# Altium PCB daughterboard.PcbDoc
Units mm, origin at the board's own origin, x right, y up, seen from the top; angles counter-clockwise.
Board outline 30 x 30 mm, 4 copper layers (Top Layer, Layer 1, Layer 2, Bottom Layer), stack 0.603 mm thick; 59 components, 37 nets, 249 pads, 127 vias.
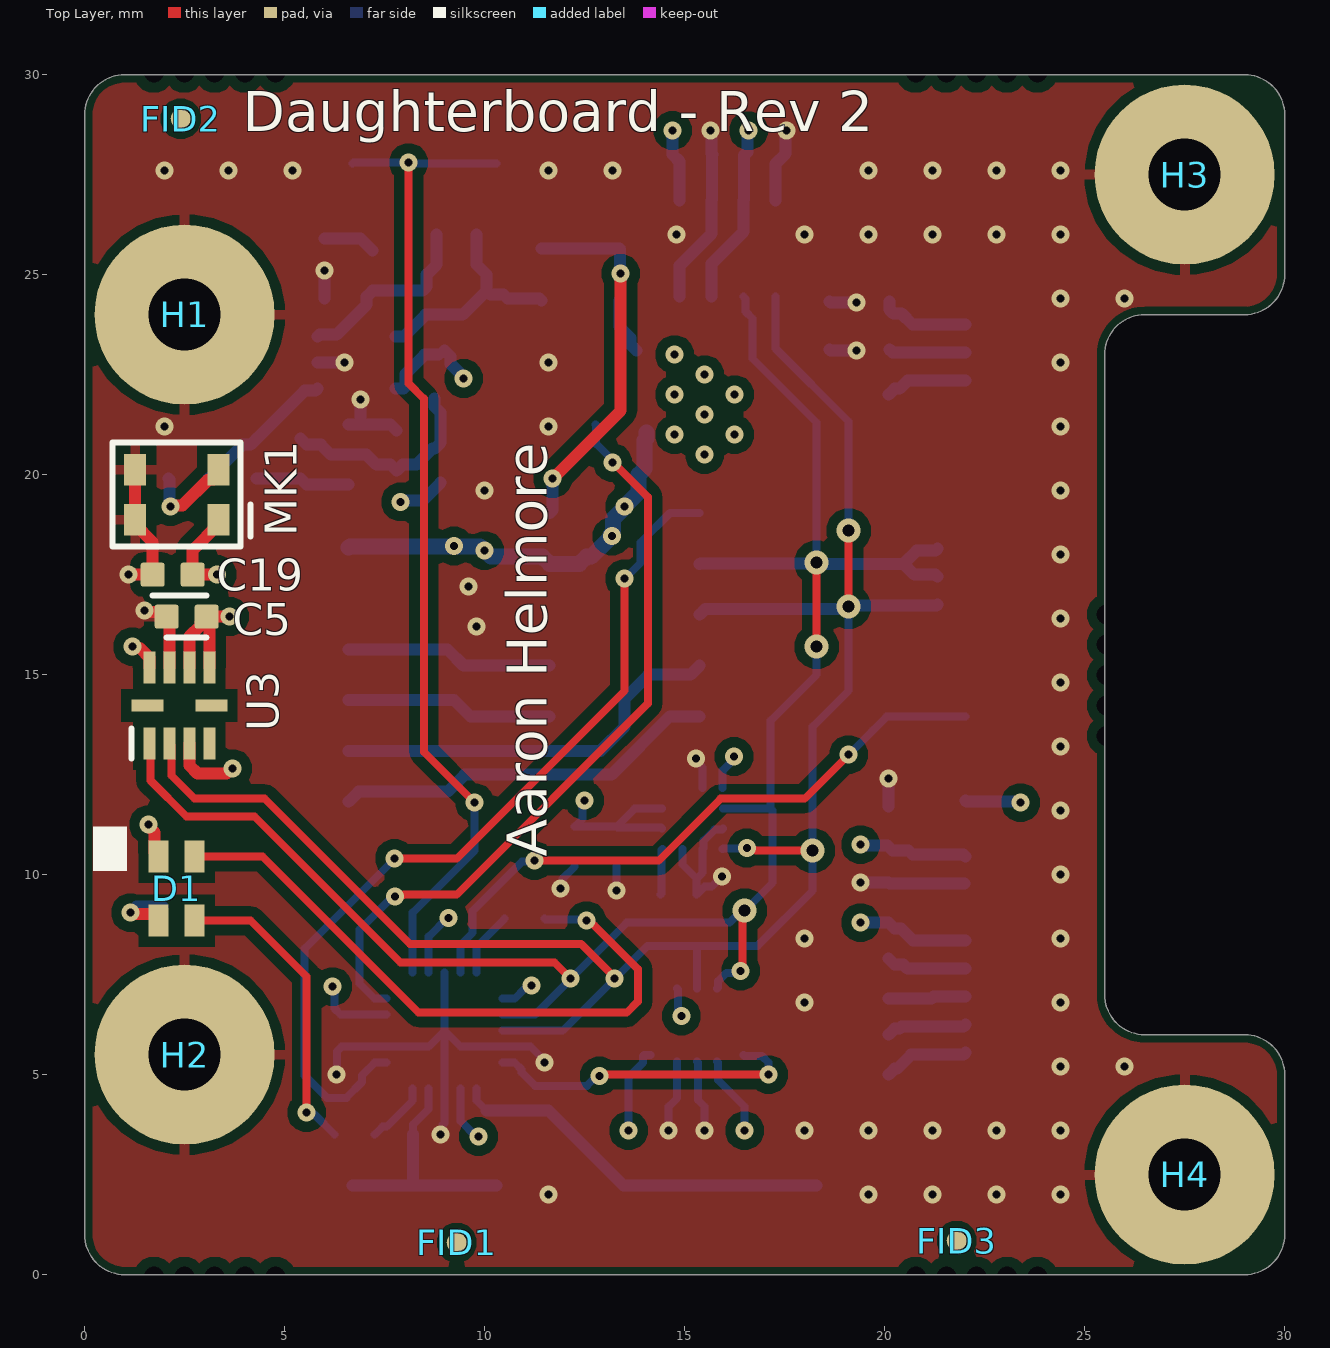
[diagram p0: Top Layer view]
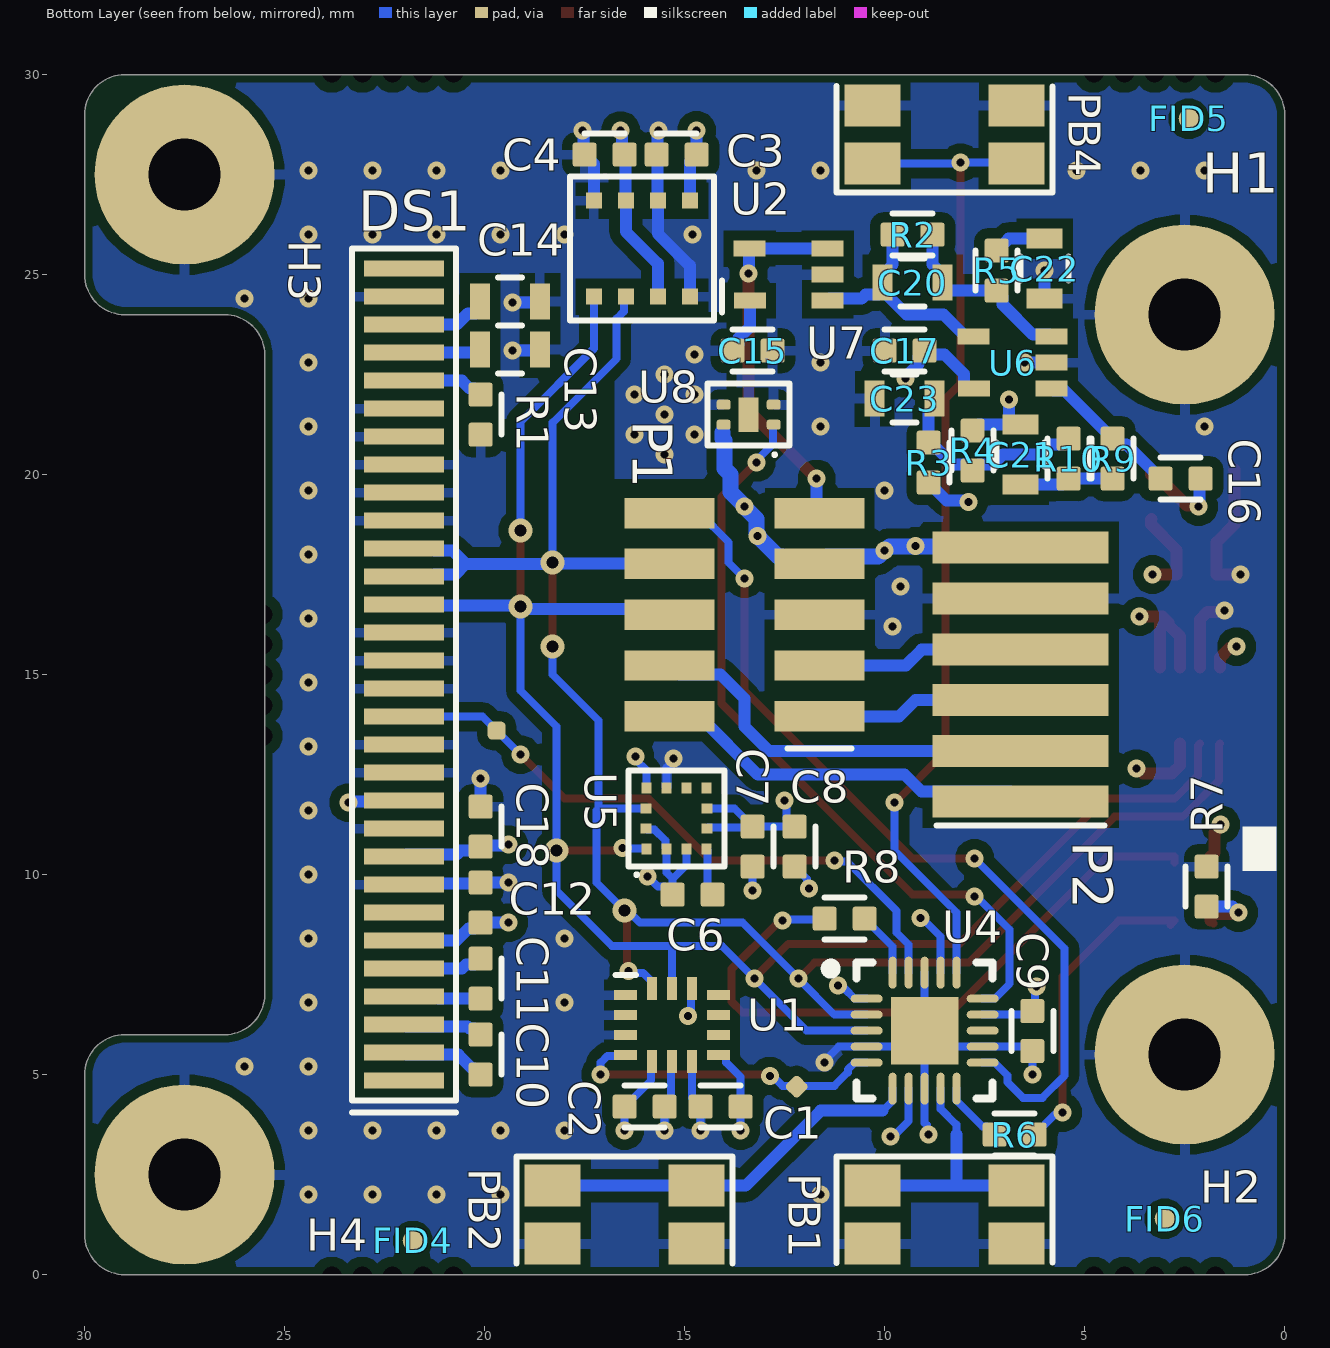
[diagram p1: Bottom Layer view, seen from below]
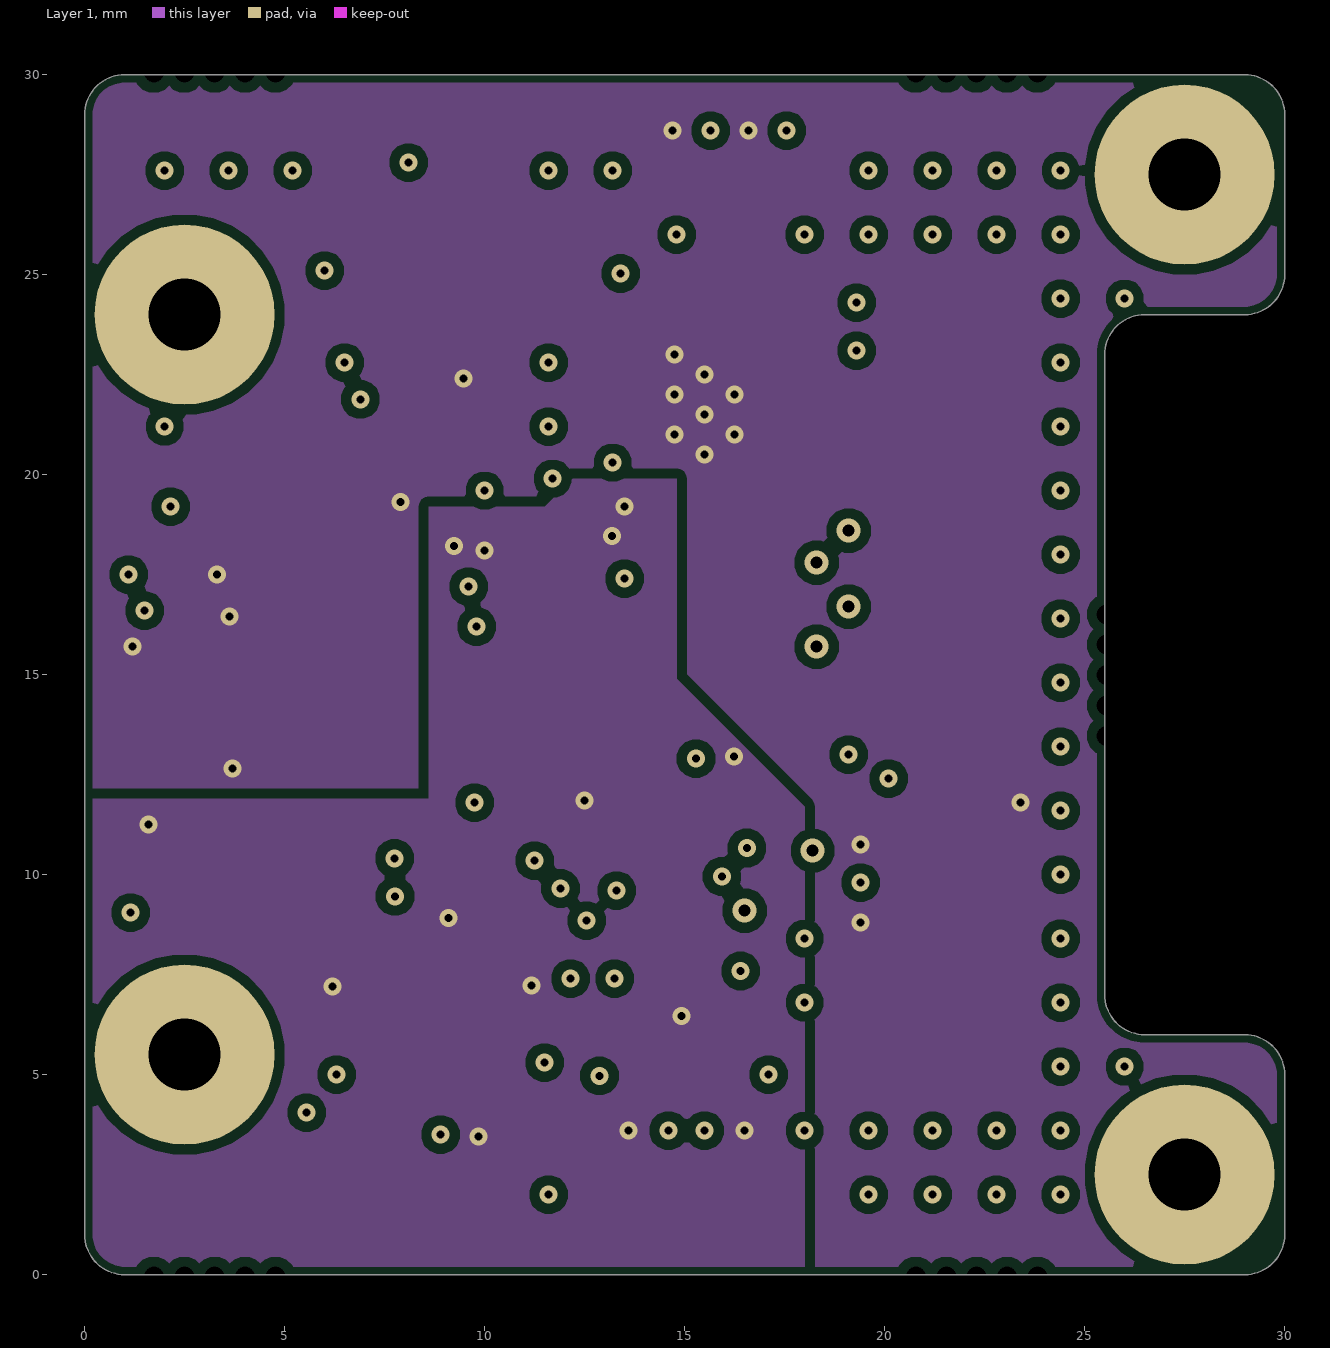
[diagram p2: Layer 1]
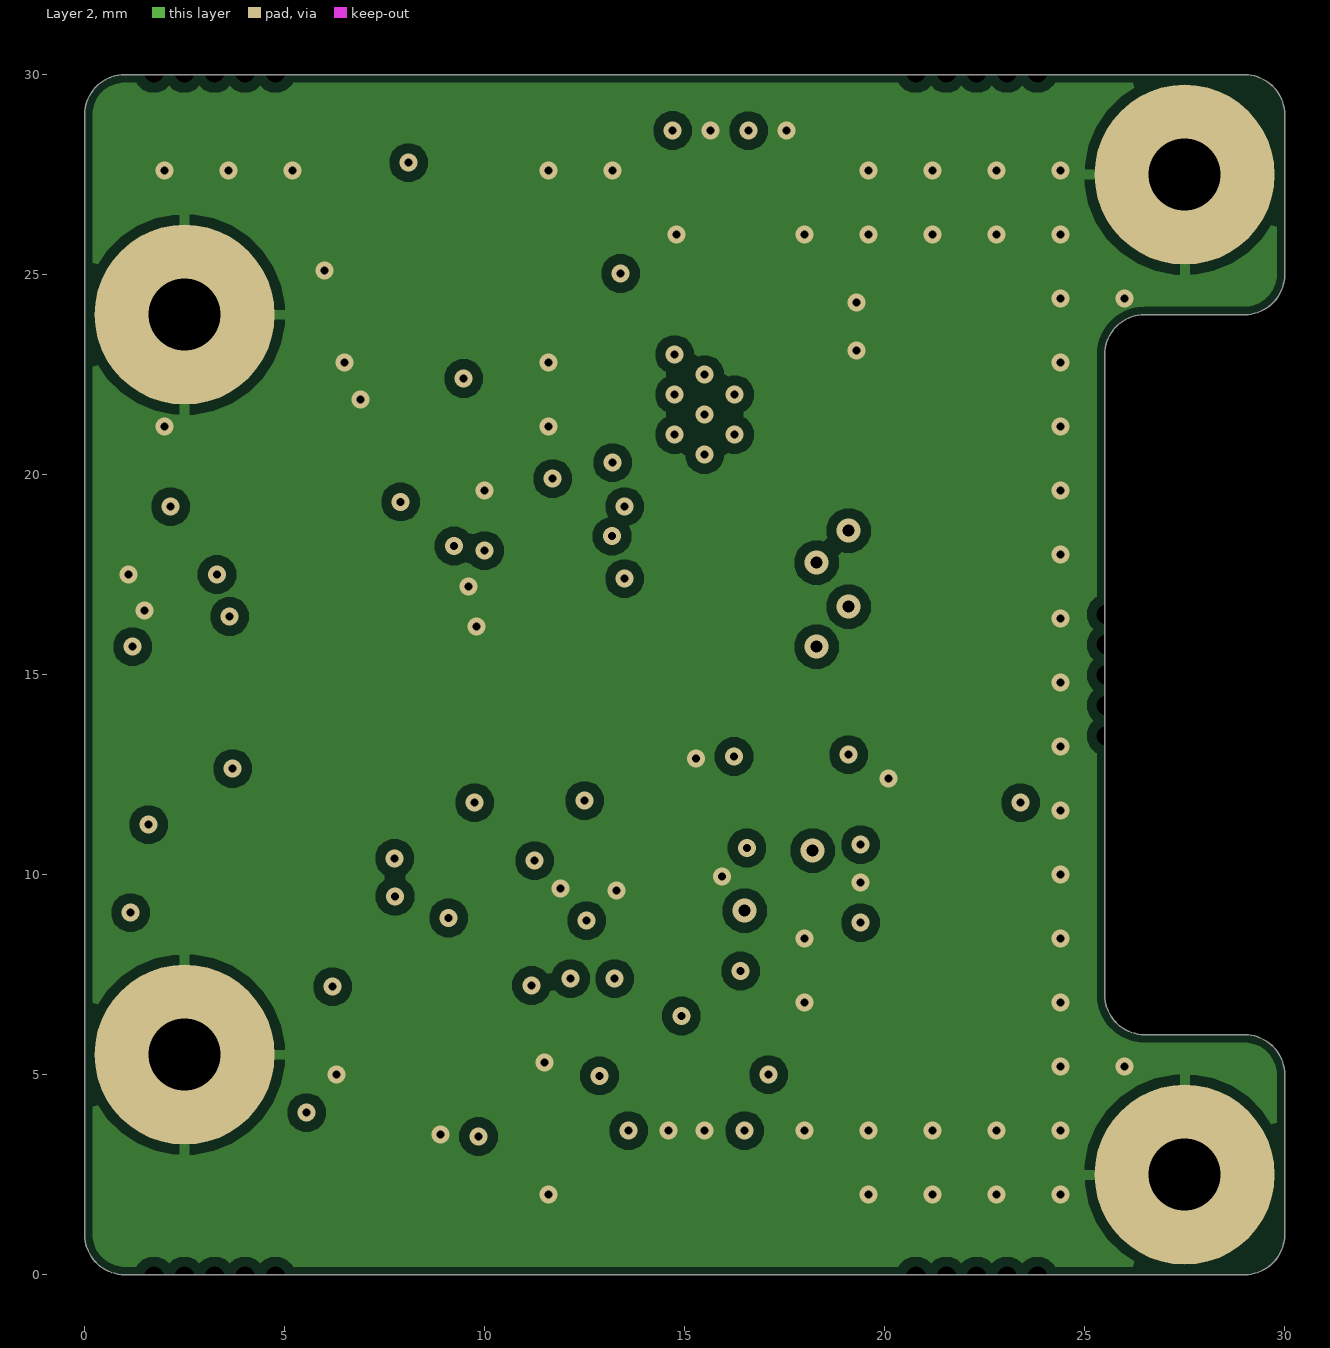
[diagram p3: Layer 2]

## Layer stack, top to bottom
Top Solder: solder mask 0.0102, Solder Resist, Dk 3.5
Top Layer: signal copper 0.0356
Dielectric 2: prepreg 0.0711, PP-006, Dk 4.1
Layer 1: signal copper 0.035
Dielectric 1: dielectric 0.32, FR-4, Dk 4.8
Layer 2: signal copper 0.035
Dielectric 3: prepreg 0.0711, PP-006, Dk 4.1
Bottom Layer: signal copper 0.0356
Bottom Solder: solder mask 0.0102, Solder Resist, Dk 3.5

## Board outline
1,0 cw(c1,1) 0,1 0,29 cw(c1,29) 1,30 0.998,30 29,30 cw(c29,29) 30,29 30,25 cw(c29,25) 29,24 26.5,24 ccw(c26.5,23) 25.5,23 25.5,7 ccw(c26.5,7) 26.5,6 29,6 cw(c29,5) 30,5 30,1 cw(c29,1) 29,0

## Design rules (kind name [scope] priority, off if disabled: settings)
BoardOutlineClearance Board_MouseBite_Clearance [IsFree and IsThruPin] p1: gap=0 ignorepadtopadclearanceinfootprint=FALSE
BoardOutlineClearance [All] p2: gap=0.2 ignorepadtopadclearanceinfootprint=FALSE
Clearance OLEDClearance [InComponent('OLED')] p1: gap=0 ignorepadtopadclearanceinfootprint=FALSE
Clearance ViaSameNet [IsVia vs IsVia] p2: gap=0.254 ignorepadtopadclearanceinfootprint=FALSE
Clearance [All] p3: gap=0.254 ignorepadtopadclearanceinfootprint=FALSE except(0: Arc-Hole Track-Hole SMDPad-Hole THPad-Hole Via-Hole Fill-Hole Poly-Hole Region-Hole Text-Hole; 0.1: Arc-Arc Arc-Track Track-Track; 0.127: SMDPad-SMDPad; 0.15: Arc-Text Track-Text SMDPad-Text THPad-Text Via-Text Fill-Text Poly-Text Region-Text Text-Text; 0.2: Arc-SMDPad Arc-THPad Track-SMDPad Track-THPad; 0.5: THPad-THPad THPad-Via Via-Via)
HoleSize [All] p1: absolutevalues=TRUE maxlimit=6.3 minlimit=0.2 maxpercent=80.000 minpercent=20.000
MinimumAnnularRing [All] p1: minimumring=0.1
MinimumSolderMaskSliver [All] p1: minsoldermaskwidth=0.1
PasteMaskExpansion [All] p1: expansion=0 percent=-10.000000
PolygonConnect [All] p1: thpad.connectstyle=Relief thpad.reliefconductorwidth=0.254 thpad.reliefentries=4 thpad.polygonreliefangle="90 Angle" thpad.airgapwidth=0.254 smdpad.connectstyle=Relief smdpad.reliefconductorwidth=0.254 smdpad.reliefentries=4 smdpad.polygonreliefangle="90 Angle" smdpad.airgapwidth=0.254 via.connectstyle=Direct via.reliefconductorwidth=0.254 via.reliefentries=4 via.polygonreliefangle="90 Angle" via.airgapwidth=0.254
RoutingVias [All] p1: holewidth=0.711 width=1.27 viastyle="Through Hole" minholewidth=0.2 minwidth=0.45 maxholewidth=0.711 maxwidth=1.27
SilkToSilkClearance [All] p1: silktosilkclearance=0.15
SilkToSolderMaskClearance [IsPad] p1: minsilkscreentomaskgap=0.1 clearancetoexposedcopper=TRUE
SolderMaskExpansion [All] p1: expansion=0.05 istentingtop=TRUE
Width [All] p1: maxlimit=0.5 minlimit=0.15 preferedwidth=0.254 minimp=50.000000 maximp=50.000000 favimp=50.000000
25 further rules are at their usual default settings.

## Components (designator, comment, footprint, x,y, rotation, side; value= is the part's Value field where it differs from the comment)
C1 "100nF" CAP_0402 14.6,4.2 r180 bottom
C2 "100nF" CAP_0402 15.5,4.2 r0 bottom
C3 "100nF" CAP_0402 15.7,28 r180 bottom
C4 "100nF" CAP_0402 17.5,28 r180 bottom
C5 "100nF" CAP_0402 2.05,16.45 r0 top
C6 "100nF" CAP_0402 15.3,9.5 r180 bottom
C7 "100nF" CAP_0402 13.3,10.2 r90 bottom
C8 "1uF" CAP_0402 12.25,10.2 r90 bottom
C9 "100nF" CAP_0402 6.31,5.59 r90 bottom
C10 "1uF" CAP_0402 20.1,5 r90 bottom
C11 "1uF" CAP_0402 20.1,7.9 r270 bottom
C12 "1uF" CAP_0402 20.1,9.8 r270 bottom
C13 "2.2uF" CAP_0603 19.37,23.13 r0 bottom
C14 "2.2uF" CAP_0603 19.37,24.33 r0 bottom
C15 "100nF" CAP_0402 12.8,23.1 r0 bottom
C16 "1uF" CAP_0402 3.1,19.9 r180 bottom
C17 "100nF" CAP_0402 10,23.1 r180 bottom
C18 "1uF" CAP_0402 20.1,11.7 r270 bottom
C19 "100nF" CAP_0402 1.7,17.5 r0 top
C20 "360pF" CAP_0603 9.3,24.8 r180 bottom
C21 "10uF" CAP_0603 6.6,20.5 r270 bottom
C22 "220nF" CAP_0603 6,25.15 r90 bottom
C23 "22uF" CAP_0603 9.5,21.9 r180 bottom
D1 "B38G3RGB" B38G3RGB 2.3,9.65 r0 top
DS1 "OLED_SSD1306" OLED_0.96INCH_SSD1306 22.02,15 r90 bottom
FID1 "Fiducial" FIDUCIAL_0.5MM_SOLDER_1MM_MASK 9.3,0.8 r90 top
FID2 "Fiducial" FIDUCIAL_0.5MM_SOLDER_1MM_MASK 2.4,28.9 r90 top
FID3 "Fiducial" FIDUCIAL_0.5MM_SOLDER_1MM_MASK 21.8,0.85 r90 top
FID4 "Fiducial" FIDUCIAL_0.5MM_SOLDER_1MM_MASK 21.8,0.85 r90 bottom
FID5 "Fiducial" FIDUCIAL_0.5MM_SOLDER_1MM_MASK 2.4,28.9 r90 bottom
FID6 "Fiducial" FIDUCIAL_0.5MM_SOLDER_1MM_MASK 3,1.4 r90 bottom
H1 "M1.6 Hole" M1.6#1 52.59,4.03 r0 top
H2 "M1.6 Hole" M1.6#2 46.32,4.03 r0 top
H3 "M1.6 Hole" M1.6#3 40.05,4.03 r0 top
H4 "M1.6 Hole" M1.6#4 33.78,4.03 r0 top
MK1 "CMM_3125" CMM_3125 2.3,19.5 r270 top
P1 "LPPB_10_2_NFSS" LPPB_10_2_NFSS 13.5,16.5 r270 bottom locked
P2 "CONN_1-26_6x1" 851-PP-NNN-40-001101 6.6,15 r90 bottom locked
PB1 "Pushbutton" EVQP7A 8.5,1.5 r180 bottom locked
PB2 "Pushbutton" EVQP7A 16.5,1.5 r180 bottom locked
PB4 "Pushbutton" EVQP7A 8.5,28.5 r0 bottom locked
R1 "390K" RES_0402 20.1,22 r270 bottom
R2 "42.2k" RES_0402 8.8,26 r0 bottom
R3 "1M" RES_0402 8.9,19.8 r90 bottom
R4 "1M" RES_0402 7.8,20.1 r90 bottom
R5 "10K" RES_0402 7.2,24.6 r90 bottom
R6 "10k" RES_0402 6.25,3.5 r0 bottom
R7 "10k" RES_0402 1.95,9.2 r90 bottom
R8 "10k" RES_0402 11.5,8.9 r180 bottom
R9 "10K" RES_0402 4.3,20.9 r270 bottom
R10 "10K" RES_0402 5.4,19.9 r90 bottom
U1 "LSM6DSO32TR" LSM6DSO 16.475,6.99 r180 bottom
U2 "BME680" BME680 16.07,25.65 r270 bottom
U3 "Si1132" Si1132 2.365,14.23 r90 top
U4 "SX1508B" QFN40P300X300X60_HS-21N 9,6.1 r180 bottom
U5 "LIS3MDL" LIS3MDL 15.2,11.4 r90 bottom
U6 "AZV321" SC-70-5 6.8,22.8 r270 bottom
U7 "AZV321" SC-70-5 12.4,25 r270 bottom
U8 "MIC94300YMT" MIC94300YMT 13.4,21.5 r270 bottom

## Footprints (in the part's own frame and the unit in brackets; to place one, negate y for a bottom-side part, rotate by r counter-clockwise, add the part's x,y. Pads: shape width x height; smd on the part's side, far side on the other; paste and mask are expansions set on the pad)
851-PP-NNN-40-001101 [mm]
  rect 0.8x4.4 smd mask+0.05: 1(-3.175,0) 2(-1.905,0) 3(-0.635,0) 4(0.635,0) 5(1.905,0) 6(3.175,0)
  silkscreen extent -3.77,-2.1 -3.77,2.1, body extent -4,-6.6 4,2.5, height 2.2
B38G3RGB [mm] "RGB LED"
  rect 0.5x0.8 smd paste-0.016 mask+0.05: 1(0.45,-0.8) 2(-0.45,-0.8) 3(-0.45,0.8) 4(0.45,0.8)
  body extent -0.8,-0.8 0.8,0.8, height 0.4
BME680 [mm]
  rect 0.4x0.4 smd paste-0.021 mask+0.1: 1(1.2,1.2) 2(1.2,0.4) 3(1.2,-0.4) 4(1.2,-1.2) 5(-1.2,-1.2) 6(-1.2,-0.4) 7(-1.2,0.4) 8(-1.2,1.2)
  silkscreen extent -1.8,-1.8 1.8,2, body extent -1.5,-1.5 1.5,1.5, height 1
CAP_0402 [mm]
  rrect20% 0.6x0.6 smd mask+0.05: 1(0,0) 2(1,0)
  silkscreen extent 0,-0.53 1,0.53, body extent 0,-0.25 1,0.25, height 0.6
CAP_0603 [mm]
  rect 0.5x0.9 smd mask+0: 1(-0.75,0) 2(0.75,0)
  silkscreen extent -0.3,-0.6 0.3,0.6, body extent -0.8,-0.4 0.8,0.4, height 0.9
CMM_3125 [mm] "MEMS Microphone"
  rect 0.79x0.55 smd mask+0.05: 1(0.625,1.04) 2(0.625,-1.04) 3(-0.625,-1.04) 4(-0.625,1.04)
  silkscreen extent -1.3,-1.6 1.3,1.85, body extent -1.25,-1.55 1.25,1.55, height 1.1
EVQP7A [mm] "Right angle tactile switch"
  rect 1.4x1.05 smd mask+0.05: 1(-1.8,0.725) 1(1.8,0.725) 2(-1.8,-0.725) 2(1.8,-0.725)
  silkscreen extent -2.7,-1.21 2.7,1.45, body extent -2.35,-2.1 2.35,1.45, height 1.35
FIDUCIAL_0.5MM_SOLDER_1MM_MASK [mm]
  round 0.5 smd mask+0.25: 1(0,0)
LIS3MDL [mm] "ST LGA-12 2x2 Magnetometer"
  rect 0.275x0.25 smd paste-0.021 mask+0.05: 1(-0.763,0.75) 2(-0.763,0.25) 3(-0.763,-0.25) 4(-0.763,-0.75) 7(0.763,-0.75) 8(0.763,-0.25) 9(0.763,0.25) 10(0.763,0.75)
  rect 0.25x0.275 smd paste-0.021 mask+0.05: 5(-0.25,-0.763) 6(0.25,-0.763) 11(0.25,0.763) 12(-0.25,0.763)
  silkscreen extent -1.41,-1.2 1.2,1.2, body extent -1,-1 1,1, height 1
LPPB_10_2_NFSS [mm]
  rect 0.76x2.25 smd mask+0.05: 1(2.54,1.875) 2(2.54,-1.875) 3(1.27,1.875) 4(1.27,-1.875) 5(0,1.875) 6(0,-1.875) 7(-1.27,1.875) 8(-1.27,-1.875) 9(-2.54,1.875) 10(-2.54,-1.875)
  silkscreen extent 3.34,1.07 3.34,2.68, body extent -3.1,-2.64 3.1,2.64, height 4.65
LSM6DSO [mm]
  rect 0.575x0.25 smd paste-0.028 mask+0.05: 1(0,0) 2(0,-0.5) 3(0,-1) 4(0,-1.5) 8(2.325,-1.5) 9(2.325,-1) 10(2.325,-0.5) 11(2.325,0)
  rect 0.25x0.575 smd paste-0.028 mask+0.05: 5(0.663,-1.663) 6(1.162,-1.663) 7(1.662,-1.663) 12(1.662,0.163) 13(1.162,0.163) 14(0.663,0.163)
  silkscreen extent -0.26,0.5 0.26,0.5, body extent -0.34,-2 2.66,0.5, height 0.86
M1.6#1 [mm]
  round 4.5 hole 1.8 mask+0.25: 1(-50.09,19.97)
M1.6#2 [mm]
  round 4.5 hole 1.8 mask+0.25: 1(-43.82,1.47)
M1.6#3 [mm]
  round 4.5 hole 1.8 mask+0.25: 1(-12.55,23.47)
M1.6#4 [mm]
  round 4.5 hole 1.8 mask+0.25: 1(-6.28,-1.53)
MIC94300YMT [mm] "200mA load switch"
  rrect50% 0.25x0.35 smd paste-0.008 mask+0.05: 1(0.25,0.625) 2(-0.25,0.625) 3(-0.25,-0.625) 4(0.25,-0.625)
  rect 0.86x0.5 smd paste-0.033 mask+0.05: EP1(0,0)
  silkscreen extent -0.77,-1.03 1.01,1.03, body extent -0.6,-0.8 0.6,0.8, height 0.55
OLED_0.96INCH_SSD1306 [mm]
  rect 0.4x2 smd mask+0.05: 1(-10.15,0) 2(-9.45,0) 3(-8.75,0) 4(-8.05,0) 5(-7.35,0) 6(-6.65,0) 7(-5.95,0) 8(-5.25,0) 9(-4.55,0) 10(-3.85,0) 11(-3.15,0) 12(-2.45,0) 13(-1.75,0) 14(-1.05,0) 15(-0.35,0) 16(0.35,0) 17(1.05,0) 18(1.75,0) 19(2.45,0) 20(3.15,0) 21(3.85,0) 22(4.55,0) 23(5.25,0) 24(5.95,0) 25(6.65,0) 26(7.35,0) 27(8.05,0) 28(8.75,0) 29(9.45,0) 30(10.15,0)
  silkscreen extent -10.95,-1.3 10.65,1.3
QFN40P300X300X60_HS-21N [mm] "QFN, 20-Leads, Body 3.00x3.00mm, Pitch 0.40mm, Thermal Pad 1.68x1.68mm, IPC Medium Density"
  oval 0.8x0.2 smd paste-0.017 mask+0.05: 1(-1.45,0.8) 2(-1.45,0.4) 3(-1.45,0) 4(-1.45,-0.4) 5(-1.45,-0.8) 11(1.45,-0.8) 12(1.45,-0.4) 13(1.45,0) 14(1.45,0.4) 15(1.45,0.8)
  oval 0.2x0.8 smd paste-0.017 mask+0.05: 6(-0.8,-1.45) 7(-0.4,-1.45) 8(0,-1.45) 9(0.4,-1.45) 10(0.8,-1.45) 16(0.8,1.45) 17(0.4,1.45) 18(0,1.45) 19(-0.4,1.45) 20(-0.8,1.45)
  rect 1.68x1.68 smd paste-2539.97 mask+0.05: 21(0,0)
  silkscreen extent -2.48,-1.7 1.7,1.7, body extent -1.55,-1.55 1.55,1.55, height 0.6
RES_0402 [mm]
  rrect20% 0.6x0.6 smd mask+0.05: 1(0,0) 2(1,0)
  silkscreen extent 0,0.53 1,0.53, body extent 0,-0.25 1,0.25, height 0.35
SC-70-5 [mm]
  rect 0.4x0.8 smd mask+0: 1(0.65,0.975) 2(0,0.975) 3(-0.65,0.975) 4(-0.65,-0.975) 5(0.65,-0.965)
  body extent -1.05,-1.1 1.05,1.1, height 1
Si1132 [mm]
  rect 0.8x0.3 smd paste-0.023 mask+0.05: 1(-0.95,0.75) 2(-0.95,0.25) 3(-0.95,-0.25) 4(-0.95,-0.75) 6(0.95,-0.75) 7(0.95,-0.25) 8(0.95,0.25) 9(0.95,0.75)
  rect 0.3x0.8 smd paste-0.023 mask+0.05: 5(0,-0.8) 10(0,0.8)
  silkscreen extent -1.32,1.19 -0.57,1.19, body extent -1,-1 1,1, height 0.65

## Part data
C1 C2 C3 C4 C5 C6 C7 C8 C9 C10 C11 C12 C13 C14 C15 C16 C17 C18 C19 C20 C22 C23: library part Capacitor, Dielectric=X5R, Voltage=25V
C21: library part Capacitor, Dielectric=X5R, Voltage=10V
D1: "RGB LED"
DS1: "SSD1306 based OLED display"
H1 H2 H3 H4: library part "M1.6 Mounting Hole"
R1 R2 R3 R4 R5 R6 R7 R8 R9 R10: library part R_Small, Tolerance=1%
  R1 R2 R5 R6 R7 R8 R9 R10: Wattage=1/10W
  R3 R4: Wattage=1/16W
U1: "STM IMU"
U2: "Bosch gas, pressure and humidity sensor"
U3: "UV index and ambient light sensor"
U4: "8 channel GPIO expander with level shifting, LED driver and keypad engine"
U5: "ST magnetometer"
U8: "200mA load switch"

## Free pads (board coordinates)
  rrect50% 0.45x0.45 smd far side rot 45 paste-2539.97 mask+0.05: 2(12.2,4.7)
  rrect50% 0.45x0.45 smd far side paste-2539.97 mask+0.05: 2(19.7,13.6)
  round 0.2 hole 0.5 unplated paste+0 mask+0: MB(1.73,-0.05) MB(1.73,30.05) MB(2.49,-0.05) MB(2.49,30.05) MB(3.25,-0.05) MB(3.25,30.05) MB(4.01,-0.05) MB(4.01,30.05) MB(4.77,-0.05) MB(4.77,30.05) MB(20.78,-0.05) MB(20.78,30.05) MB(21.54,-0.05) MB(21.54,30.05) MB(22.3,-0.05) MB(22.3,30.05) MB(23.06,-0.05) MB(23.06,30.05) MB(23.82,-0.05) MB(23.82,30.05) MB(25.55,13.47) MB(25.55,14.23) MB(25.55,14.99) MB(25.55,15.75) MB(25.55,16.51)

## Via types
v1: diameter 0.45, hole 0.2, Top Layer to Bottom Layer, tented both sides, 120 vias
v2: diameter 0.6, hole 0.3, Top Layer to Bottom Layer, tented both sides, 6 vias
v3: diameter 0.45, hole 0.2, Top Layer to Bottom Layer, tented top, 1 vias

## Nets (pads, with @x,y where several pads share a name; then routed paths per layer and width w, separated by ;. In a path a pad name is that pad's centre, name@x,y a point inside that pad or via, vN(x,y) a via of type N, cw(c..) or ccw(c..) an arc to the next point about the centre after c; other vN are vias at no path point)
3V3: C1.2 C2.2 C7.2 C8.2 C9.2 D1.3 P1.7 P2.6 U1.5 U1.8 U1.12 U4.1 U4.7 U4.14 U4.17 U5.5 U5.6 U5.10 U8.4 | length 26.8
  Top Layer w0.3: v1(1.6,11.25) 1.6,11.209 1.75,11.059 1.75,10.55 D1.3
  Bottom Layer w0.2: v1(6.2,7.2) 6.248,7.152 6.248,6.652 6.4,6.5 U4.14 ; U4.17 8.6,8.45 9.071,8.921 v1(9.1,8.921) ; U4.7 9.4,3.842 9.786,3.456 v1(9.849,3.456) ; U4.1 10.75,6.9 11.002,7.152 11.025,7.152 11.103,7.23 v1(11.17,7.23) ; v1(12.5,11.85) 12.5,11.782 12.45,11.732 12.45,11.4 C8.2 C7.2 ; v1(13.6,3.6) C1.2 13.6,4.94 13.962,5.302 13.962,5.465 13.987,5.49 U1.8 ; U5.5 14.412,11.175 13.325,11.175 C7.2 ; U5.6 13.75,11.65 C7.2 ; U1.12 14.837,7.128 14.837,6.617 14.916,6.538 v1(14.916,6.47) ; U1.5 15.837,5.302 15.837,4.863 C2.2 v1(16.5,3.6) ; U5.10 15.95,12.603 16.234,12.887 v1(16.234,12.955)
  Bottom Layer w0.4: P2.6 6.628,18.203 9.225,18.203 v1(9.235,18.213) ; v1@9.258,18.203 9.883,18.203 9.986,18.1 10.014,18.1 10.164,17.95 11.445,17.95 P1.7 12.37,17.77 12.55,17.95 12.661,17.95 13.172,18.461 v1(13.186,18.461) ; v1@13.15,18.494 13.202,18.546 13.202,18.889 13.5,19.186 13.5,19.214 13.85,19.564 13.85,20 14,20.15 14,20.854 14.05,20.904 14.05,21.05
  other v1: 10,18.1 13.5,19.2
3V3_SW: C3.2 C4.2 C5.2 C12.2 C15.2 C17.2 C18.2 C19.2 DS1.6 DS1.9 DS1.11 MK1.1 R3.1 U2.2 U2.6 U2.8 U3.3 U3.6 U3.7 U3.9 U6.5 U7.5 U8.3 | length 26.6
  Top Layer w0.3: v1(1.2,15.699) 1.228,15.67 1.375,15.67 1.615,15.43 U3.9 ; U3.3 2.615,12.735 2.82,12.53 3.539,12.53 3.659,12.65 v1(3.7,12.65) ; U3.7 2.615,15.955 2.9,16.24 2.9,16.3 C5.2 ; U3.6 3.115,16.385 C5.2 ; v1(3.308,17.504) 3.306,17.502 2.702,17.502 C19.2 2.7,18.115 3.34,18.755 MK1.1 MK1.1@3.328,18.887 ; v1(3.626,16.453) 3.624,16.452 3.052,16.452 C5.2
  Bottom Layer w0.3: U6.5 7.965,22.15 8.015,22.2 8.015,22.515 8.499,22.999 C17.2@8.85,22.999 ; v1(7.9,19.321) 7.929,19.35 8.45,19.35 R3.1 ; C17.2 9.15,22.95 9.15,22.769 9.476,22.442 v1(9.476,22.402) ; U7.5 13.365,23.7 13.65,23.415 13.65,23.25 C15.2 ; v1(14.7,28.604) C3.2 14.87,27.83 U2.8 ; U2.2 15.67,25.275 16.47,26.075 U2.6 16.485,26.865 16.485,27.985 C4.2 16.571,28.071 16.571,28.571 v1(16.6,28.6) ; v1(19.4,8.8) C12.2 20.25,8.65 20.41,8.65 20.71,8.35 DS1.6 ; v1(19.4,10.75) 19.425,10.725 20.075,10.725 C18.2 20.201,10.599 20.601,10.599 20.7,10.5 21.97,10.5 DS1.9 ; DS1.11 22.045,11.825 23.375,11.825 v1(23.4,11.8)
  other v1: 15.5,20.5 14.75,21 16.25,21 15.5,21.5 14.75,22 16.25,22 15.5,22.5 14.75,23
3V3_SW_EN: U4.15 U8.1 | length 19.2
  Top Layer w0.2: v1(7.759,9.459) 7.798,9.498 7.975,9.498 7.977,9.5 9.3,9.5 14.079,14.279 14.079,19.44 13.219,20.3 v3(13.2,20.3)
  Bottom Layer w0.2: U4.15 7.25,6.9 6.875,7.275 6.875,8.625 7.709,9.459 v1(7.759,9.459) ; U8.1 12.788,21.238 12.788,20.771 13.2,20.359 v3(13.2,20.3)
DEBUG_UART_RX: P1.4 P2.2 | length 10.1
  Bottom Layer w0.3: P2.2 12.895,13.095 13.5,13.7 13.5,14.4 14.1,15 15.145,15 P1.4
DEBUG_UART_TX: P1.2 P2.1 | length 9.7
  Bottom Layer w0.3: P2.1 6.85,12.075 9.075,12.075 9.5,12.5 13.17,12.5 14.63,13.96 P1.2
GND: C1.1 C2.1 C3.1 C4.1 C5.1 C6.1 C7.1 C8.1 C9.1 C12.1 C13.1 C14.1 C15.1 C17.1 C18.1 C19.1 C21.1 C22.1 C23.1 DS1.8 DS1.10 DS1.12 DS1.13 DS1.15 DS1.16 DS1.17 DS1.21 DS1.22 DS1.23 DS1.24 DS1.25 DS1.29 H1.1 H2.1 H3.1 H4.1 MK1.2 MK1.3 P1.5 P2.5 PB1.2 PB2.2 PB4.2 R1.2 R4.2 R7.2 U1.1 U1.2 U1.3 U1.6 U1.7 U2.1 U2.5 U2.7 U3.8 U4.4 U4.8 U4.12 U4.18 U4.21 U5.2 U5.3 U5.9 U5.12 U6.2 U7.2 U8.2 U8.EP1 | length 39.6
  Top Layer w0.3: v1(1.1,17.5) C19.1 1.7,17.65 1.7,18.315 1.26,18.755 MK1.2 MK1.3 MK1.3@1.272,20.112 ; v1(1.5,16.6) 1.529,16.571 1.929,16.571 2.115,16.385 U3.8
  Bottom Layer w0.2: v1(6.3,5) 6.305,5.005 6.305,5.585 6.42,5.7 U4.12 8.6,5.7 U4.21 ; v1(8.9,3.5) 8.948,3.548 8.948,3.737 9,3.789 U4.8 U4.21 ; U4.18 U4.21 ; v1(11.5,5.3) 11.5,5.35 11.15,5.7 U4.4 9.4,5.7 U4.21 ; v1(11.898,9.655) 11.946,9.703 11.946,9.896 C8.1 ; v1(13.3,9.6) C7.1 ; v1(14.6,3.6) C1.1 14.812,4.412 U1.7 ; U5.3 14.95,10.25 15.3,9.9 ; v1(15.285,12.899) 15.285,12.847 15.45,12.682 U5.9 ; U1.6 15.337,5.302 15.337,4.363 C2.1 v1(15.5,3.6) ; v1(15.929,9.951) 15.918,9.951 15.667,9.7 15.5,9.7 C6.1 15.3,9.9 ; U5.12 15.938,11.125 15.751,11.125 15.475,10.849 15.475,10.662 U5.2 15.45,10.05 15.3,9.9 ; C12.1 C12.1@20.125,9.775 ; DS1.8@21.995,9.775 DS1.8
  Bottom Layer w0.3: U6.2 v1(6.5,22.8) ; C22.1 v1(6,25.1) ; C21.1 6.79,21.25 6.89,21.35 v1(6.89,21.885) ; C21.1@6.8,21.25 7.65,21.25 R4.2 ; U2.1 14.87,25.225 15.67,26.025 U2.7 15.685,26.865 15.685,27.985 C3.1 15.675,28.025 15.675,28.575 v1(15.65,28.6) ; U2.5 17.27,27.77 C4.1 17.525,28.025 17.525,28.575 v1(17.55,28.6) ; C13.1 18.65,23.1 v1(19.3,23.1) ; C14.1 18.65,24.3 v1(19.3,24.3) ; v1(19.4,9.8) C12.1 ; C18.1 v1(20.1,12.4) ; C12.1@20.125,9.775 DS1.8@21.995,9.775
  other v1: 11.6,2 19.6,2 21.2,2 22.8,2 24.4,2 18,3.6 19.6,3.6 21.2,3.6 22.8,3.6 24.4,3.6 24.4,5.2 26,5.2 18,6.8 24.4,6.8 18,8.4 24.4,8.4 24.4,10 24.4,11.6 24.4,13.2 24.4,14.8 9.8,16.2 24.4,16.4 9.6,17.2 24.4,18 10,19.6 24.4,19.6 2,21.2 11.6,21.2 24.4,21.2 11.6,22.8 24.4,22.8 24.4,24.4 26,24.4 14.8,26 18,26 19.6,26 21.2,26 22.8,26 24.4,26 2,27.6 3.6,27.6 5.2,27.6 11.6,27.6 13.2,27.6 19.6,27.6 21.2,27.6 22.8,27.6 24.4,27.6
HAT_INT: P1.10 U4.11 | length 22.3
  Top Layer w0.2: v1(7.75,10.409) 7.759,10.4 9.3,10.4 13.5,14.6 v1(13.5,17.4)
  Bottom Layer w0.2: U4.11 7.25,5.3 6.934,4.984 6.934,4.816 6.54,4.421 6.06,4.421 5.5,4.981 5.5,8.15 7.75,10.4 v1(7.75,10.409) ; v1(13.5,17.4) 13.9,17.8 13.9,18.31 14.63,19.04 P1.10
I2C_SCL: DS1.18 P1.6 U1.13 U2.4 U3.2 U4.3 U5.1 | length 48.6
  Top Layer w0.2: U3.2 2.165,13.23 2.165,12.485 2.75,11.9 4.5,11.9 8.129,8.271 12.41,8.271 13.25,7.431 v1(13.25,7.4) ; v1(16.552,10.668) 16.6,10.62 16.757,10.62 16.777,10.6 v2(18.2,10.6) ; v2(19.1,16.7) v2(19.1,18.6)
  Bottom Layer w0.2: U4.3 11.95,6.1 v1(13.25,7.4) 14.073,8.223 15.312,8.223 ; U1.13 15.312,8.223 ; U5.1 15.965,10.652 16.537,10.652 v1(16.552,10.668) ; U2.4 17.27,23.154 19.1,21.324 v2(19.1,18.6) ; v2(19.1,16.7) 19.1,14.6 18.2,13.7 v2(18.2,10.6) 18.2,9.6 16.823,8.223 15.312,8.223
  Bottom Layer w0.3: P1.6 15.518,16.643 19.043,16.643 v2(19.1,16.7) 19.125,16.725 21.295,16.725 DS1.18@21.32,16.75
I2C_SDA: DS1.19 DS1.20 P1.8 U1.14 U2.3 U3.1 U4.2 U5.11 | length 48.2
  Top Layer w0.2: U3.1 1.646,13.249 1.646,12.354 2.55,11.45 4.25,11.45 7.9,7.8 10.922,7.8 10.93,7.809 11.41,7.809 11.419,7.8 11.75,7.8 v1(12.15,7.4) ; v1(16.4,7.594) 16.448,7.642 16.448,9.048 v2(16.5,9.1) ; v2(18.3,15.7) v2(18.3,17.8)
  Bottom Layer w0.2: U4.2 11.259,6.5 v1@12.15,7.391 ; v1(12.15,7.4) 13.55,8.8 16.119,8.8 v2@16.419,9.1 ; U1.14 15.837,7.178 15.837,7.34 16.043,7.546 16.352,7.546 v1(16.4,7.594) ; U5.11 17.15,11.65 ; U2.3 16.522,24.398 16.522,24.078 16.7,23.9 16.7,22.9 18.3,21.3 v2(18.3,17.8) ; v2(16.5,9.1) 17.2,9.8 17.2,11.6 17.15,11.65 ; v2(18.3,15.7) 18.3,15 17.15,13.85 17.15,11.65
  Bottom Layer w0.3: v1@12.15,7.391 v1(12.15,7.4) ; P1.8 15.39,17.785 18.285,17.785 v2(18.3,17.8) 18.33,17.77 20.47,17.77 ; v2@16.419,9.1 v2(16.5,9.1) ; DS1.19@21.32,17.45 21.27,17.5 20.74,17.5 20.47,17.77 ; DS1.20@21.32,18.15 21.27,18.1 20.8,18.1 20.47,17.77
LSM6D_INT: pad.2@12.2,4.7 U1.4 U4.5 | length 8
  Top Layer w0.2: v1(12.872,4.972) 12.899,5 v1(17.1,5)
  Bottom Layer w0.2: U4.5 10.75,5.3 10.921,5.129 10.921,5.06 11.26,4.721 12.553,4.721 12.804,4.972 v1(12.872,4.972) ; U1.4 16.5,5.465 16.935,5.465 17.1,5.3 v1(17.1,5)
MIC: P1.9 U7.3 U7.4 | length 9.3
  Top Layer w0.3: v1(11.7,19.9) 13.4,21.6 v1(13.4,25.029)
  Bottom Layer w0.3: U7.3 U7.4 13.388,25.637 13.388,25.041 v1(13.4,25.029) ; P1.9 11.7,19.115 v1(11.7,19.9)
NetC6_2: C6.2 U5.4 | length 1.2
  Bottom Layer w0.2: C6.2@14.4,9.5 14.425,9.525 14.425,10.613 U5.4
NetC10_1: C10.1 DS1.2 | length 2.1
  Bottom Layer w0.3: C10.1 20.25,5.15 20.31,5.15 20.66,5.5 21.97,5.5 DS1.2
NetC10_2: C10.2 DS1.3 | length 2
  Bottom Layer w0.3: C10.2 20.25,6.15 20.376,6.15 20.426,6.2 21.97,6.2 DS1.3
NetC11_1: C11.1 DS1.5 | length 2
  Bottom Layer w0.3: C11.1 20.25,7.75 20.47,7.75 20.57,7.65 DS1.5
NetC11_2: C11.2 DS1.4 | length 1.9
  Bottom Layer w0.3: C11.2 21.17,6.9 21.22,6.95 DS1.4
NetC13_2: C13.2 DS1.27 | length 1.9
  Bottom Layer w0.3: C13.2 20.2,23.05 DS1.27
NetC14_2: C14.2 DS1.28 | length 2.3
  Bottom Layer w0.3: C14.2 20.12,24.13 20.22,24.03 20.42,24.03 20.7,23.75 DS1.28
NetC16_1: C16.1 R9.1 U6.1 | length 3.7
  Bottom Layer w0.3: C16.1 3.95,20.75 4.15,20.75 R9.1 5.5,22.1 5.775,22.1 U6.1
NetC16_2: C16.2 MK1.4 | length 2.4
  Top Layer w0.3: v1(2.15,19.2) 2.179,19.229 2.444,19.229 3.095,19.88 3.215,19.88 3.34,20.005 MK1.4
  Bottom Layer w0.3: C16.2 2.125,19.875 2.125,19.225 v1(2.15,19.2)
NetC20_1: C20.1 R2.2 U6.4 U7.1 | length 5.7
  Bottom Layer w0.3: U6.4 7.975,23.45 8.525,24 9.45,24 C20.1@10.05,24.6 ; R2.2 9.8,25.25 10.05,25 C20.1 C20.1@10.05,24.6 ; U7.1 11.375,24.4 10.575,24.4 10.475,24.5 10.15,24.5 C20.1@10.05,24.6
NetC20_2: C20.2 R2.1 R5.1 U6.3 | length 4.8
  Bottom Layer w0.3: U6.3 5.875,23.5 6.295,23.5 7.05,24.255 7.05,24.45 R5.1 8.45,24.6 8.55,24.7 C20.2 8.55,25 8.8,25.25 R2.1
NetC21_2: C21.2 R9.2 R10.1 | length 2.4
  Bottom Layer w0.3: R9.2 R10.1 5.55,19.75 5.726,19.75 ; 5.726,19.75 C21.2
NetC22_2: C22.2 R5.2 | length 1.3
  Bottom Layer w0.3: C22.2 6.9,25.9 R5.2
NetC23_2: C23.2 R3.2 R4.1 R10.2 | length 5.3
  Bottom Layer w0.3: R10.2 5.55,20.75 5.905,20.75 6.155,20.5 7.045,20.5 7.295,20.25 7.65,20.25 R4.1 7.95,20.25 8.29,20.25 8.69,20.65 8.75,20.65 R3.2 8.9,21.55 8.75,21.7 C23.2
NetD1_1: D1.1 R6.1 | length 7.9
  Top Layer w0.2: D1.1@2.852,8.748 D1.1 4.15,8.85 5.55,7.45 v1(5.55,4.05)
  Bottom Layer w0.2: v1(5.55,4.05) 5.598,4.002 5.748,4.002 R6.1
NetD1_2: D1.2 R7.1 | length 1.8
  Top Layer w0.2: D1.2@1.775,8.775 D1.2
  Top Layer w0.3: v1(1.15,9.05) 1.179,9.021 1.75,9.021 1.85,8.921 D1.2
  Bottom Layer w0.3: v1(1.15,9.05) 1.3,9.2 R7.1
NetD1_4: D1.4 R8.1 | length 16.6
  Top Layer w0.2: D1.4@2.75,10.3 D1.4 4.45,10.45 8.35,6.55 13.55,6.55 13.829,6.829 13.829,7.64 12.744,8.725 ; v1(12.55,8.85) 12.618,8.85 12.743,8.725
  Bottom Layer w0.2: R8.1 11.525,8.875 12.525,8.875 v1(12.55,8.85)
NetDS1_26: DS1.26 R1.1 | length 2.1
  Bottom Layer w0.3: R1.1 20.25,22.15 20.37,22.15 20.57,22.35 DS1.26
NetPB1_1: PB1.1 U4.9 | length 6.2
  Bottom Layer w0.2: 8.209,3.5 8.209,3.749 8.6,4.14 U4.9
  Bottom Layer w0.3: PB1.1@6.7,2.225 8.209,2.225 ; 8.209,3.5 8.209,2.225 ; PB1.1@10.3,2.225 8.209,2.225
NetPB2_1: PB2.1 U4.6 | length 9.7
  Bottom Layer w0.2: U4.6 9.8,4.35 10.05,4.1
  Bottom Layer w0.3: 10.05,4.1 11.6,4.1 13.475,2.225 14.7,2.225 PB2.1@18.3,2.225
NetPB4_1: PB4.1 U4.16 | length 25.2
  Top Layer w0.2: v1(8.1,27.8) 8.1,22.277 8.479,21.898 8.479,13.071 v1(9.75,11.8)
  Bottom Layer w0.2: PB4.1@6.7,27.775 6.725,27.8 v1(8.1,27.8) ; v1@8.075,27.775 PB4.1@10.3,27.775 ; U4.16 8.2,9.05 9.75,10.6 v1(9.75,11.8)
NetR6_2: R6.2 U4.10 | length 1.6
  Bottom Layer w0.2: R6.2 7.45,3.7 7.55,3.7 8.2,4.35 U4.10
NetR8_2: R8.2 U4.20 | length 1.6
  Bottom Layer w0.2: U4.20 9.8,8.2 R8.2
nRST: DS1.14 pad.2@19.7,13.6 U4.19 | length 16
  Top Layer w0.2: v1(11.25,10.35) 14.35,10.35 15.9,11.9 18,11.9 v1(19.1,13)
  Bottom Layer w0.2: U4.19 9.4,8.25 9.7,8.55 9.7,9.089 10.934,10.323 11.223,10.323 v1(11.25,10.35) ; v1(19.1,13) 19.7,13.6 20.05,13.95 DS1.14
SWDCLK: P1.3 P2.4 | length 5.2
  Bottom Layer w0.3: P2.4 6.609,15.626 9.074,15.626 9.47,15.23 P1.3
SWDIO: P1.1 P2.3 | length 5.2
  Bottom Layer w0.3: P2.3 9.235,14.365 9.64,13.96 P1.1
pads on no net: DS1.1 DS1.7 DS1.30 FID1.1 FID2.1 FID3.1 FID4.1 FID5.1 FID6.1 U1.9 U1.10 U1.11 U3.4 U3.5 U3.10 U4.13 U5.7 U5.8

## Polygon pours and split planes (outlines as drawn)
GND on Bottom Layer "BOTTOM_GND" (solid, remove dead copper, pour order 4): 0,30 30,30 30,0 0,0
3V3_SW on Bottom Layer "3V3_SW_L04_P002" (solid, pour order 2): 13.96,19.9 16.75,19.9 16.75,23.8 13.96,23.8
3V3_SW on Layer 1 "3V3_SW_INNER" (solid, pour order 7): 30,30 0,30 0,0 30,0
3V3 on Layer 1 "3V3_INNER" (solid, pour order 6): 18,0 18,11.7 14.8,14.9 14.8,19.9 12.2,19.9 11.5,19.2 8.6,19.2 8.6,11.9 0,11.9 0,0
GND on Layer 2 "INNER_GND" (solid, remove dead copper, pour order 0): 0,30 30,30 30,0 0,0
GND on Top Layer "TOP_GND" (solid, remove dead copper, pour order 3): 0,30 30,30 30,0 0,0

## Silkscreen, mask and mechanical layers (free items; w line width, h text height)
Top Overlay:
  region: 0.21,11.2 1.05,11.2 1.05,10.1 0.21,10.1
  text "Daughterboard - Rev 2" at 3.95,28.583 h1
  text "Aaron Helmore" at 11.55,10.45 h1 r90
Bottom Overlay:
  region: 0.21,11.2 1.05,11.2 1.05,10.1 0.21,10.1
Mechanical 1:
  lines w0.15: 0,29 cw(c1,29) 1,30 ; 0,29.002 0,1 ccw(c1,1) 1,0 29,0 ccw(c29,1) 30,1 30,5 ccw(c29,5) 29,6 26.5,6 cw(c26.5,7) 25.5,7 25.5,23 cw(c26.5,23) 26.5,24 29,24 ccw(c29,25) 30,25 30,29 ccw(c29,29) 29,30 0.998,30
Route Tool Path:
  lines w2: 1,-1 cw(c1,1) -1,1 -1,29 cw(c1,29) 1,31 ; 5.5,-1 20.05,-1 ; 5.5,31 20.05,31 ; 24.55,-1 29,-1 ccw(c29,1) 31,1 31,5 ccw(c29,5) 29,7 26.5,7 26.5,12.75 ; 24.55,31 29,31 cw(c29,29) 31,29 31,25 cw(c29,25) 29,23 26.5,23 26.5,17.25